# Altium PCB ESP32 with USBC PCB V1l1.PcbDoc (part 3 of 3)
Units mil, origin at the board's own origin, x right, y up, seen from the top; angles counter-clockwise.
Board outline 2700 x 1000 mil, 4 copper layers (L1, L2, L3, L4), stack 61.581 mil thick; 64 components, 73 nets, 299 pads, 161 vias.
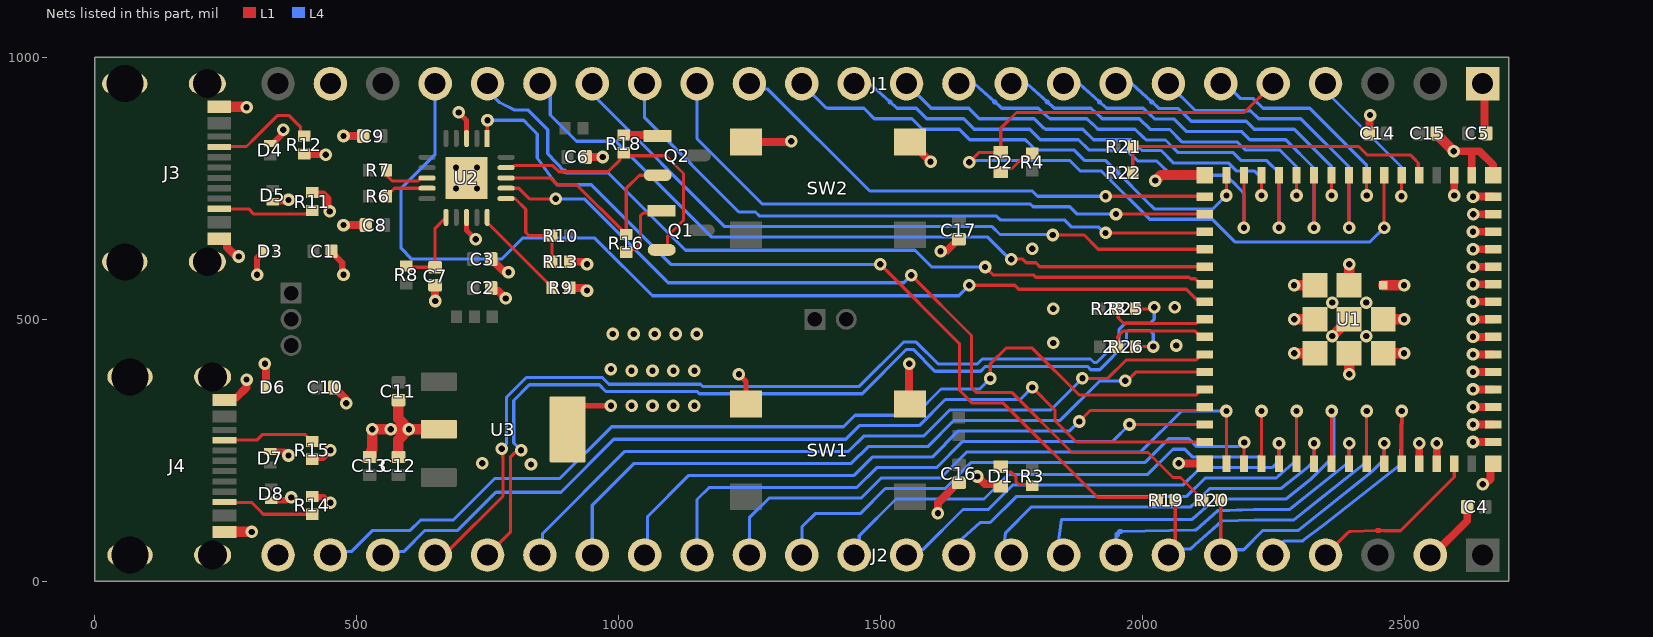
[diagram p4: the nets of this part, all layers, seen from the top]

## Via types
v1: diameter 24, hole 12, L1 to L4, tented both sides, 161 vias

## Nets (pads, with @x,y where several pads share a name; then routed paths per layer and width w, separated by ;. In a path a pad name is that pad's centre, name@x,y a point inside that pad or via, vN(x,y) a via of type N, cw(c..) or ccw(c..) an arc to the next point about the centre after c; other vN are vias at no path point) (continued)
CON_ESP_USB_N: J2.21 R25.1 | length 1793.8
  L1 w6.03: J2.21@650,50 661.09,61.09 678.22,61.09 779.58,162.45 779.58,237.15 779.22,237.51 779.22,250.78 v1(777,253) ; R25.1@1987.01,520 2020,520 v1(2023,523)
  L4 w6.03: v1(777,253) 785.97,261.97 785.97,350.81 824.19,389.03 968.99,389.03 981.87,376.15 1156.24,376.15 1160.4,371.99 1459.6,371.99 1544.22,456.61 1568.39,456.61 1610,415 1685.61,415 1694.93,424.32 1901.25,424.32 1907.87,417.7 1912.86,417.7 1955.97,460.81 1955.97,480.76 1967.72,492.51 2015,492.51 2023,500.51 v1(2023,523)
CON_ESP_USB_P: J2.20 R26.1 | length 1734.7
  L1 w6.03: J2.20@750,50 793.61,93.61 793.61,237.06 803.11,246.56 810.56,246.56 v1(814,250) ; R26.1@1987.01,448 v1(2021,448)
  L4 w6.03: v1(814,250) 800,264 800,345 830,375 963.18,375 976.06,362.12 1150.42,362.12 1154.59,357.95 1465.41,357.95 1550.03,442.58 1562.58,442.58 1604.19,400.97 1691.42,400.97 1700.74,410.29 1895.44,410.29 1902.06,403.67 1918.67,403.67 1970,455 1970,474.95 1973.53,478.49 2015,478.49 2021,472.49 v1(2021,448)
DTR_FTDI: Q2.2 R16.1 U2.18 | length 433.4
  L1 w6: U2.18@785.41,770 870.03,770 883.03,757 920.01,757 1008.19,668.82 1008.19,667.64 1013.82,662.01 R16.1@1015,662.01 1015,750 1040.2,775.2 Q2.2@1075,775.2
ESP_USB_N: R23.2 R25.2 U1.23 | length 190.7
  L1 w6.03: R23.2@1953.01,520 1954.32,518.67 1954.32,502.68 1965,492 2103.57,492 2111.57,500 U1.23@2119.45,500
ESP_USB_P: 2.2 R26.2 U1.24 | length 194.6
  L1 w6.03: R26.2@1952.99,448 1952.99,466.82 1964.14,477.97 2100.14,477.97 2111.57,466.54 U1.24@2119.45,466.54
FTDI_RESET: C7.2 R8.2 U2.11 | length 159.8
  L1 w6: R8.2@595,602.01 597.6,599.41 C7.2@650,599.41 650,673.96 U2.11@670.63,694.59
FTDI_USB_N: R6.2 U2.9 | length 84.6
  L1 w6.03: R6.2@557.01,735 557.01,736.18 564.62,743.8 565.8,743.8 572.32,750.32 U2.9@634.59,750.32
FTDI_USB_P: R7.2 U2.8 | length 94.3
  L1 w6.03: R7.2@557.01,785 557.01,775 567.66,764.34 617.54,764.34 623.19,770 U2.8@634.59,770
GND: C1.1 C2.1 C3.1 C4.1 C5.1 C6.1 C7.1 C8.1 C9.1 C10.1 C11.1 C12.1 C13.1 C14.1 C15.1 C16.1 C17.1 D1.1 D3.1 D4.1 D5.1 D6.1 D7.1 D8.1 J1.1 J1.23 J2.2 J2.24 J3.A1B12 J3.B1A12 J3.S1 J3.S2 J3.S3 J3.S4 J4.A1B12 J4.B1A12 J4.S1 J4.S2 J4.S3 J4.S4 R9.2 R11.1 R12.1 R13.1 R14.1 R15.1 SW1.3 SW1.4 SW2.3 SW2.4 U1.1 U1.2 U1.42 U1.43 U1.46 U1.47 U1.48 U1.49 U1.50 U1.51 U1.52 U1.53 U1.54 U1.55 U1.56 U1.57 U1.58 U1.59 U1.60 U1.61 U1.62 U1.63 U1.64 U1.65 U1.66 U1.67 U1.68 U1.69 U1.70 U1.71 U1.72 U1.73 U2.3 U2.13 U2.21 U3.2 U3.4 | length 3742
  L1 w6: v1@782.32,542.68 v1(785,540)
  L1 w10.01: v1(695,895) 710,880 U2.3@710,845.41 ; U2.13@710,694.59 710,670 v1(727.32,652.68) ; v1@787.32,592.68 788.28,591.72 v1(790,590) ; U3.4@903.03,290 903.03,305.56 932.47,335 v1(985.57,335) ; v1(1230,395) 1243.5,381.5 SW1.4@1243.5,338.58
  L1 w12: v1@310,585.82 310,617.16 317.03,624.19 321.31,624.19 322.2,625.08 D3.1@322.2,630 ; D7.1@335,247.59 362.41,247.59 v1(370,240) ; D4.1@335.11,835.59 339.92,835.59 357.7,853.37 357.7,859.75 v1(360,862.05) ; D8.1@337,154.41 366.16,154.41 371.75,160 v1(375,160) ; D5.1@340,724.41 340.89,725.3 364.05,725.3 366.75,728 v1(370,728) ; R15.1@415,232.99 417.95,235.94 435.94,235.94 v1(450,250) ; R14.1@420.73,163.26 420.73,160.16 420.81,160.08 436.97,160.08 447.05,150 v1(450,150) ; v1@439.02,815.98 v1(441,814) ; C1.1@452.2,630 452.2,628.62 472.7,608.12 472.7,587.3 v1(475,585)
  L1 w15: J3.B1A12@237.64,653.94 248.46,653.94 252.78,649.63 252.78,637.7 268.75,621.72 273.28,621.72 v1(275,620) ; J4.A1B12@247.64,346.06 251.95,350.37 270.37,350.37 290,370 v1(290,385) ; v1(325,415) 327.2,412.8 D6.1@327.2,370 ; R12.1@400,815.98 v1@439.02,815.98 ; R11.1@414.69,743.5 419.23,738.96 436.21,738.96 445,730.17 445,712.27 448.81,708.46 v1(448.81,706.02) ; C10.1@457.2,370 457.2,368.62 461.52,364.31 462.89,364.31 480,347.2 v1(480,340) ; v1(475,680) C8.1@517.8,680 ; v1(475,850) C9.1@512.8,850 ; v1(650,535) C7.1@650,565 ; C2.1@757.2,560 757.2,558.62 761.52,554.31 770.69,554.31 v1@782.32,542.68 ; C3.1@757.2,615 757.2,613.62 761.52,609.31 762.89,609.31 780.48,591.72 v1@788.28,591.72 ; R9.2@907.01,560 935,560 v1(940,555) ; R13.1@907.01,610 935,610 v1(940,605) ; C6.1@937.2,810 v1(970,810) ; SW2.4@1243.5,838.58 1328.58,838.58 v1(1330,840) ; v1(1555,415) 1555,340.08 SW1.3@1556.5,338.58 ; SW2.3@1556.5,838.58 1561.42,838.58 1579.51,820.49 1579.51,817.21 1587.22,809.5 v1(1595.86,800.86) ; v1(1610,130) 1610,149.17 1648.62,187.8 C16.1@1650,187.8 ; v1(1615,630) 1616.72,631.72 1627.55,631.72 1648.62,652.8 C17.1@1650,652.8 ; v1(1685,200) 1699.39,185.61 1725.69,185.61 D1.1@1730,181.3 ; v1(2070,225) 2070.3,224.7 2119.15,224.7 U1.64@2119.45,224.41 ; C14.1@2432.8,855 2433.9,856.1 2433.9,888.9 v1(2435,890) ; U1.42@2528.9,224.41 v1(2528.9,263.5) ; J2.2@2550,50 2555,50 2620.59,115.59 C4.1@2620.59,142.8 ; U1.43@2562.36,224.41 v1(2562.36,263.5) ; v1(2595,820.83) 2630,820.83 ; v1(2595.83,736.5) U1.2@2595.83,775.59 ; U1.1@2629.29,775.59 2629.29,820.12 2630,820.83 ; v1(2631.54,265.75) U1.46@2670.63,265.75 ; v1(2631.54,299.21) U1.47@2670.63,299.21 ; v1(2631.54,332.68) U1.48@2670.63,332.68 ; v1(2631.54,366.14) U1.49@2670.63,366.14 ; v1(2631.54,399.61) U1.50@2670.63,399.61 ; v1(2631.54,433.07) U1.51@2670.63,433.07 ; v1(2631.54,466.54) U1.52@2670.63,466.54 ; v1(2631.54,500) U1.53@2670.63,500 ; v1(2631.54,533.46) U1.54@2670.63,533.46 ; v1(2631.54,566.93) U1.55@2670.63,566.93 ; v1(2631.54,600.39) U1.56@2670.63,600.39 ; v1(2631.54,633.86) U1.57@2670.63,633.86 ; v1(2631.54,667.32) U1.58@2670.63,667.32 ; v1(2631.54,734.25) U1.60@2670.63,734.25 ; v1(2631.89,700.64) U1.59@2670.98,700.64 ; J1.1@2650,950 2653.85,946.15 2653.85,858.35 C5.1@2657.2,855 ; v1@2655,185 2665,195 2665,218.78 U1.65@2670.63,224.41 ; U1.62@2670.63,775.59 2670,776.22 2670,795 2644.17,820.83 2630,820.83
  L1 w20: J3.A1B12@237.64,905.91 284.09,905.91 v1@285,905 ; J4.B1A12@247.64,94.09 v1(300,94.09) ; C13.1@525,237.2 526.38,237.2 528.19,239.02 528.19,248.92 530,250.73 v1(530,290) v1(565,290) v1(600,290) ; C12.1@580,237.2 580,270 v1(600,290) ; C11.1@580,342.8 580,310 v1(600,290) ; U3.2@656.97,290 v1(600,290) ; v1(2025,765) 2026.08,765 2036.67,775.59 U1.63@2119.45,775.59 ; v1(2290,565) 2330.04,565 U1.71@2330.08,564.96 ; v1(2290.04,435.04) U1.73@2330.08,435.04 ; v1(2290.04,500) U1.72@2330.08,500 ; v1(2363,468) U1.61@2395.04,500 ; v1(2395.04,395) U1.70@2395.04,435.04 ; U1.69@2395.04,564.96 v1(2395.04,605) ; U1.68@2460,435.04 v1(2500.04,435.04) ; U1.67@2460,500 v1(2500.04,500) ; U1.66@2460,564.96 v1(2500.04,564.96) ; C15.1@2562.2,855 2562.2,853.62 v1(2595,820.83)
  other v1: 2650,185 833,223 740,225 1025,335 1065,335 1105,335 1145,335 1025,401.99 1065,401.99 1105,401.99 1145,401.99 985.57,405 2065,450 1830,455 2428,468 989,472 1029.43,471.99 1069.43,471.99 1109.43,471.99 1149.43,471.99 1830,520 2062,523 2363,532 2428,532 310,585 1790,635 690,750 730,750 690,790 730,790 290,905
GPIO0: R21.2 R22.2 U1.4 | length 632.2
  L1 w6: R22.2@1982.01,780 R21.2@1982.01,830 2413.31,830 2429.54,813.78 2512.45,813.78 2518.31,807.92 2518.31,807.27 2527.03,798.55 2527.03,777.46 U1.4@2528.9,775.59
GPIO1: J1.4 U1.5 | length 315.8
  L1 w6: v1(2495,735) 2495,775.16 U1.5@2495.43,775.59
  L4 w6: J1.4@2350,950 2350,936 2495,791 v1(2495,735)
GPIO2: D2.1 J1.5 U1.6 | length 1638.2
  L1 w6: v1(1670,800) 1688.7,818.7 D2.1@1730,818.7 1730,865 1760,895 2195,895 J1.5@2250,950 ; v1@2461.97,675.04 U1.6@2461.97,775.59
  L4 w6: v1(1670,800) 1672.68,802.68 1682.54,802.68 1682.86,803 1862.08,803 1882.29,783 1922.19,783 2014.53,691 2134,691 2177,648 2434.93,648 v1(2461.93,675)
GPIO3: J1.6 U1.7 | length 440
  L1 w6: v1(2428.5,736.5) U1.7@2428.5,775.59
  L4 w6: J1.6@2150,950 2159.14,950 2187.8,921.33 2212.2,921.33 2230.53,903 2320,903 2428.5,794.5 v1(2428.5,736.5)
GPIO4: J1.7 U1.8 | length 627.5
  L1 w6: v1(2395,675) v1(2395,675) U1.8@2395.04,775.59
  L4 w6: J1.7@2050,950 2101.64,898.36 2206.89,898.36 2222.25,883 2303,883 2395,791 v1(2395,675)
GPIO5: J1.8 U1.9 | length 569.9
  L1 w6: v1(2361.57,736.5) U1.9@2361.57,775.59
  L4 w6: J1.8@1950,950 1980.14,950 2018.38,915.23 ; 2018.51,915.1 2032.64,902.36 2036.78,902.36 2069.36,902.36 2093.36,878.36 2198.61,878.36 2213.96,863 2290,863 2361.57,791.43 v1(2361.57,736.5)
  L4 w10: 2018.38,915.23 ccw(c2050,950) 2018.51,915.1
GPIO6: J1.9 U1.10 | length 757.4
  L1 w6: v1(2328.07,675) U1.10@2328.11,775.59
  L4 w6: J1.9@1850,950 1879.95,950 1918.46,915.15 ; 1918.6,915.02 1932,903 1936.14,903 2002.1,903 2024.36,882.36 2061.07,882.36 2085.07,858.36 2190.32,858.36 2205.68,843 2274,843 2328.07,788.93 v1(2328.07,675)
  L4 w10: 1918.46,915.15 ccw(c1950,950) 1918.6,915.02
GPIO7: J1.10 U1.11 | length 702.1
  L1 w6: v1(2294.65,736.5) U1.11@2294.65,775.59
  L4 w6: J1.10@1750,950 1779.95,950 1818.46,915.15 ; 1818.6,915.02 1832,903 1836.14,903 1902.08,903 1923.72,883 1994.25,883 2016.07,862.36 2052.79,862.36 2076.79,838.36 2182.04,838.36 2197.4,823 2263,823 2294.65,791.35 v1(2294.65,736.5)
  L4 w10: 1818.46,915.15 ccw(c1850,950) 1818.6,915.02
GPIO8: J1.11 U1.12 | length 884.6
  L1 w6: v1@2261.18,675.04 U1.12@2261.18,775.59
  L4 w6: J1.11@1650,950 1679.95,950 1718.46,915.15 ; 1718.6,915.02 1729.15,905.56 1732,903 1735.83,903 1802,903 1812.56,892.44 1823.72,883 1894.25,883 1909.71,868.71 1909.85,868.58 1915.43,863 1986.29,863 2002.13,848.02 2007.79,842.36 2044.51,842.36 2068.51,818.36 2173.75,818.36 2189.11,803 2238,803 2261.14,779.86 v1(2261.14,675)
  L4 w10: 1718.46,915.15 ccw(c1750,950) 1718.6,915.02
GPIO9: J1.12 U1.13 | length 824.4
  L1 w6: v1(2227.72,736.5) U1.13@2227.72,775.59
  L4 w6: J1.12@1550,950 1597,903 1668.72,903 1688.72,883 1793.72,883 1811.72,865 1813.43,865 1815.43,863 1886.43,863 1907.15,843 1978.33,843 1999.51,822.36 2036.22,822.36 2060.22,798.36 2165.47,798.36 2180.83,783 2214.57,783 2227.72,769.86 v1(2227.72,736.5)
GPIO10: J1.13 U1.14 | length 995.8
  L1 w6: v1@2194.25,675.04 U1.14@2194.25,775.59
  L4 w6: J1.13@1450,950 1479.95,950 1518.46,915.15 ; 1518.6,915.02 1532,903 1568.72,903 1588.72,883 1659,883 1679,863 1785.43,863 1805.43,843 1878.35,843 1898.86,823 1970.19,823 1991.22,802.36 2027.94,802.36 2055.29,775 2160,775 2171.5,763.5 2171.97,763.5 2187.79,747.68 2187.79,747.21 2194.21,740.79 v1(2194.21,675)
  L4 w10: 1518.46,915.15 ccw(c1550,950) 1518.6,915.02
GPIO11: J1.14 U1.15 | length 959
  L1 w6: v1(2160.79,736.5) U1.15@2160.79,775.59
  L4 w6: J1.14@1350,950 1396.51,903.49 1400.52,903 1468.72,903 1471.64,900.07 1488.72,883 1560.43,883 1580.43,863 1650.72,863 1670.72,843 1777,843 1787,833 1787.15,833 1794.22,825.93 1797.15,823 1870.21,823 1884.78,808.8 1884.82,808.76 1890.58,803 1930.37,803 1954.99,778.82 2007.02,726.8 2022.82,711 2135.29,711 v1(2160.79,736.5)
GPIO12: J1.15 U1.16 | length 958.8
  L1 w6: v1(1930,735) 2118.7,735 U1.16@2119.45,734.25
  L4 w6: J1.15@1250,950 1260.33,939.67 1285.33,939.67 1480,745 1790,745 1800,735 v1(1930,735)
GPIO13: J1.16 U1.17 | length 1134.2
  L1 w6: v1(1950,701) 1950.11,700.89 2119.34,700.89 U1.17@2119.45,700.79
  L4 w6: J1.16@1150,950 1150,845 1275,720 1786.72,720 1791.72,715 1861.96,715 1875.96,701 v1(1950,701)
GPIO14: J1.17 U1.18 | length 1226.5
  L1 w6: v1(1930,665) 2117.13,665 U1.18@2119.45,667.32
  L4 w6: J1.17@1050,950 1050,885 1230,705 1261.72,705 1269.72,697 1721.71,697 1728.71,690 1851.18,690 1865.18,676 1917.14,676 1928.14,665 v1(1930,665)
GPIO15: J1.18 U1.19 | length 1312.1
  L1 w6: v1(1829,661) 1889,661 1916.14,633.86 U1.19@2119.45,633.86
  L4 w6: J1.18@950,950 960.33,939.67 960.33,919.67 1203,677 1713.43,677 1728.43,662 1828,662 v1(1829,661)
GPIO16: J1.19 U1.20 | length 1437.7
  L1 w6: v1(1750,615) 1771.82,615 1778.82,608 1797.1,608 1804.71,600.39 U1.20@2119.45,600.39
  L4 w6: J1.19@850,950 869.82,930.18 869.82,890.18 920,840 995,840 1178,657 1705.14,657 1747.14,615 v1(1750,615)
GPIO17: J1.20 U1.21 | length 1559.2
  L1 w6: v1(1700,600) 1715.02,584.98 1791.83,584.98 1796.42,580.39 2089.43,580.39 2092.31,577.52 2100.98,577.52 2108.7,569.8 2116.57,569.8 U1.21@2119.45,566.93
  L4 w6: J1.20@750,950 753.55,934.19 766.6,920.35 772.46,914.49 801.64,900 827.12,900 865,862.12 865,816.44 896.59,783.03 896.69,782.93 899.62,780 980,780 1128,632 1566.18,632 1598.18,600 v1(1700,600)
GPIO18: J1.21 U1.22 | length 1967.8
  L1 w6: v1(1669.98,564.98) 1756.73,564.98 1764.2,557.52 2084.02,557.52 2105.2,536.34 2116.57,536.34 U1.22@2119.45,533.46
  L4 w6: J1.21@650,950 650,870 650,815 605,770 585,750 585,635.5 605.5,615 776.82,615 816.82,655 835,655 955,655 1065,545 1650,545 v1(1669.98,564.98)
GPIO21: J2.19 U1.25 | length 1450.3
  L1 w6: v1(1885.91,387.28) 1934.09,387.28 1969.3,422.48 2102.84,422.48 2108.7,428.34 2108.7,430.2 2111.57,433.07 U1.25@2119.45,433.07
  L4 w6: J2.19@850,50 855.14,55.14 855.14,91.14 1012,248 1439.3,248 1468.3,277 1582.4,277 1632.4,327 1825.63,327 v1(1885.91,387.28)
GPIO26: J2.18 U1.26 | length 1369.9
  L1 w6: v1(1967.55,382.55) 1971.34,382.55 1988.39,399.61 U1.26@2119.45,399.61
  L4 w6: J2.18@950,50 950,145 1030,225 1444.59,225 1476.59,257 1590.68,257 1640.68,307 1843.82,307 1919.37,382.55 v1(1967.55,382.55)
GPIO33: J2.17 U1.28 | length 1226.4
  L1 w6: v1(1880,305) 1901.21,326.21 2105.11,326.21 2111.57,332.68 U1.28@2119.45,332.68
  L4 w6: J2.17@1050,50 1055.33,55.33 1055.33,123.33 1134,202 1449.87,202 1484.87,237 1598.96,237 1648.96,287 1862,287 v1(1880,305)
GPIO34: J2.16 U1.29 | length 1134.8
  L1 w6: v1(1975.79,299.21) U1.29@2119.45,299.21
  L4 w6: J2.16@1150,50 1150,156 1173,179 1455.16,179 1493.16,217 1607.25,217 1657.25,267 1943.57,267 v1(1975.79,299.21)
GPIO35: J2.15 U1.31 | length 1166.9
  L1 w6: U1.31@2160.79,224.41 v1(2160.83,325)
  L4 w6: J2.15@1250,50 1250,121 1288,159 1463.44,159 1501.44,197 1615.53,197 1665.53,247 1997.25,247 2075.25,325 v1(2160.83,325)
GPIO36: J2.14 U1.32 | length 1017.7
  L1 w6: U1.32@2194.25,224.41 v1@2194.25,263.46 ; v1@2194.25,264.25 v1(2195,265)
  L4 w6: J2.14@1350,50 1350.6,100.4 1350.65,104.47 1353.57,107.4 1375.7,129 1461.73,129 1509.73,177 1623.82,177 1673.82,227 2005.53,227 2050.53,272 2089.47,272 2104.47,257 2183.21,257 2191.21,265 v1(2195,265)
GPIO37: J2.13 U1.33 | length 1068.6
  L1 w6: U1.33@2227.72,224.41 v1@2227.72,324.96
  L4 w6: J2.13@1450,50 1459.73,59.73 1459.73,86.73 1530,157 1698,157 1745,204 2010.82,204 2058.82,252 2081.18,252 2096.18,237 2221.9,237 2227.76,242.86 v1(2227.76,325)
GPIO38: J2.12 U1.34 | length 858.2
  L1 w6: U1.34@2261.18,224.41 v1(2261.18,263.5)
  L4 w6: J2.12@1550,50 1560.33,60.33 1581.19,60.33 1657.86,137 1706.28,137 1753.28,184 2074.17,184 2078.27,184 2111.38,217 2244.32,217 2248.07,217 2261.18,230.11 v1(2261.18,263.5)
GPIO39: J2.11 U1.35 | length 926.4
  L1 w6: U1.35@2294.65,224.41 v1@2294.65,324.96
  L4 w6: J2.11@1650,50 1650,74.64 1653.78,78.78 1657,82 1690.16,112 1709.57,112 1759.16,161.59 2079.85,161.59 2083.91,161.59 2086.82,164.42 2117.43,194.17 2120.34,197 2256.36,197 2262.92,203.56 2266.19,206.27 2294.69,231.16 v1(2294.69,325)
GPIO40: J2.10 U1.36 | length 763
  L1 w6: U1.36@2328.11,224.41 v1(2328.11,263.5)
  L4 w6: J2.10@1750,50 1736.68,66.8 1736.68,70.86 1739.17,92.51 1788.26,141.59 2091.89,141.59 2094.58,143.97 2095.01,144.39 2102.05,151.17 2102.19,151.3 2106.75,155.87 2109.24,158.1 2125.96,174.2 2128.87,177 2150.96,177 2261.78,177 2265.24,177 2318.24,219.66 2319.04,220.38 2328.11,229.45 v1(2328.11,263.5)
GPIO41: J2.9 U1.37 | length 826.6
  L1 w6: U1.37@2361.57,224.41 v1(2361.61,325)
  L4 w6: J2.9@1850,50 1838.89,64.85 1838.89,68.9 1845.97,117.94 2095.36,117.94 2139.42,157 2274.54,157 2321.86,194.92 2365.62,238.68 2365.62,320.99 v1(2361.61,325)
GPIO42: J2.8 U1.38 | length 605.8
  L1 w6: U1.38@2395.04,224.41 v1(2395.04,263.5)
  L4 w6: J2.8@1950,50 1950,86.52 1952.34,88.86 ; 1952.69,90.38 1957.07,94.77 ; 1959.28,95.16 2099.45,98.02 2099.67,98.03 2103.32,98.27 2144.17,134.48 2213.96,137 2281.56,137 2391.72,225.27 2395.04,228.58 v1(2395.04,263.5)
  L4 w10: 1952.34,88.86 cw(c1959.39,88.06) 1952.69,90.38 ; 1957.07,94.77 cw(c1959.39,88.06) 1959.28,95.16
GPIO45: J2.5 U1.41 | length 511.7
  L1 w6: U1.41@2495.43,224.41 v1@2495.43,324.96
  L4 w6: J2.5@2250,50 2256.56,68.61 2259.38,71.42 2271.03,77 2306.42,77 2347.16,107.86 2347.24,107.92 2490.42,220.76 2493.69,224.03 2493.76,228.07 v1(2495.47,325)
GPIO46: J2.4 U1.44 | length 332.4
  L1 w6: J2.4@2350,50 2392.22,92.22 2395,95 2398.92,95.14 2448.16,96.96 ; 2452.93,96.91 2461.58,96.37 2466.37,96.37 2466.46,96.46 2493.17,96.46 2595.83,199.11 U1.44@2595.83,224.41
  L1 w10: 2448.16,96.96 cw(c2450,50) 2452.94,96.91
GPIO47: J2.23 U1.27 | length 1892
  L1 w6: v1(1710,387) 1710,415 1740,445 1790,445 1879.45,355.55 2102.84,355.55 2108.7,361.41 2108.7,363.27 2111.57,366.14 U1.27@2119.45,366.14
  L4 w6: J2.23@450,50 456.47,56.47 490,56.47 530.53,97 602.25,97 622.25,117 684.64,117 763.64,196 888,196 987,295 1429.74,295 1451.74,317 1565.83,317 1615.83,367 1690,367 v1(1710,387)
GPIO48: J2.22 U1.30 | length 1756.9
  L1 w6: v1(1790,370) 1833.47,326.53 1833.47,306.53 1874.25,265.75 U1.30@2119.45,265.75
  L4 w6: J2.22@550,50 556.47,56.47 590,56.47 630.53,97 692.92,97 765.92,170 890.28,170 991.28,271 1434.02,271 1460.02,297 1574.11,297 1624.11,347 1767,347 v1(1790,370)
NetD1_2: D1.2 R3.1 | length 80
  L1 w6: D1.2@1730,218.7 1731.97,218.7 1742.56,208.11 1749.99,208.11 1758.78,199.32 1758.78,190.5 1764.64,184.64 1788.35,184.64 R3.1@1790,182.99
NetD2_2: D2.2 R4.1 | length 74.8
  L1 w6: D2.2@1730,781.3 1736.81,788.11 1751.46,788.11 1774.73,811.38 1784.37,811.38 R4.1@1790,817.01
NetJ3_A5: J3.A5 R12.2 | length 210.2
  L1 w6: J3.A5@237.64,829.13 238.54,830.04 289.81,830.04 308.19,848.42 308.19,848.69 316.98,857.48 317.25,857.48 348.82,889.05 371.18,889.05 393.19,867.04 393.19,855.63 398.82,850 R12.2@400,850
NetJ3_B5: J3.B5 R11.2 | length 184.4
  L1 w6: J3.B5@237.64,711.02 293.98,711.02 304,701 305,701 402.33,701 403.69,702.36 409.37,702.36 R11.2@415,707.99
NetJ4_A5: J4.A5 R15.2 | length 177.9
  L1 w6: J4.A5@247.64,269.29 309.29,269.29 320,280 402.01,280 408.19,273.82 408.19,272.64 413.82,267.01 R15.2@415,267.01
NetJ4_B5: J4.B5 R14.2 | length 177
  L1 w6: J4.B5@247.64,151.18 248.54,150.28 270.02,150.28 270.08,150.21 299.79,150.21 315,135 322.01,127.99 R14.2@415,127.99
NetQ1_1: Q1.1 R16.2 | length 131
  L1 w6: R16.2@1015,627.99 1020.63,633.62 1030.27,633.62 1041.81,645.16 1041.81,697.26 1047.67,703.12 1078.29,703.12 Q1.1@1082.58,707.4
NetQ2_1: Q2.1 R18.2 | length 63
  L1 w15: R18.2@1010,852.01 Q2.1@1072.99,852.01
NetR9_1: R9.1 U2.15 | length 175.1
  L1 w6: U2.15@749.6,683.06 750.35,682.3 751.86,682.3 867.35,566.81 872.99,561.18 R9.1@872.99,560
RTS_FTDI: Q1.2 R18.1 U2.19 | length 547.3
  L1 w6: U2.19@785.41,789.68 796.72,789.68 800.63,793.6 874.71,793.6 886.5,781.81 979.99,781.81 1003.19,805.01 1003.19,812.36 1008.82,817.99 R18.1@1010,817.99 1015.63,812.36 1090.43,812.36 1124.29,778.5 1124.29,689.46 1093.69,658.86 1093.69,638.38 1087.91,632.6 Q1.2@1082.58,632.6
RXD_FTDI: R19.2 U2.1 | length 1697.8
  L1 w6: U2.1@749.37,845.41 749.6,845.64 749.6,870 749.6,879.6 v1(750,880) ; v1(1500,605) 1651,454 1651,365 1654,362 1654,361.72 1675.72,340 1735,340 1915.17,159.83 2024.16,159.83 R19.2@2028.99,155
  L4 w6: v1(750,880) 818.84,880 828.84,870 835,863.84 842.07,856.77 845,853.84 845,808.16 877.14,762.86 883,757 887.14,757 891.18,757 948,757 1100,605 v1(1500,605)
TXD_FTDI: R20.2 U2.17 | length 1646.9
  L1 w6: U2.17@785.41,750.32 809.69,750.32 823.02,736.98 830,730 v1(880,730) ; v1(1559.09,584.09) 1674,469.18 1674,370 1684,360 1751.72,360 1865.97,245.75 2011.07,245.75 2058.82,198 2072.99,198 R20.2@2115.99,155
  L4 w6: v1(880,730) 935,730 1095,570 1545,570 v1(1559.09,584.09)
U0RXD: J2.6 R20.1 U1.40 | length 555.4
  L1 w6: J2.6@2150,50 R20.1@2150.01,155 ; U1.40@2461.97,224.41 v1(2461.97,263.5)
  L4 w6: J2.6@2150,50 2160,60 2193.53,60 2230.53,97 2260.49,97 2298.13,97 2433.51,205.47 2442.27,213 2461.97,232.69 v1(2461.97,263.5)
U0TXD: J2.7 R19.1 U1.39 | length 752.8
  L1 w6: J2.7@2050,50 2050,64.61 2063.01,77.62 R19.1@2063.01,155 ; U1.39@2428.5,224.41 v1(2428.54,325)
  L4 w6: J2.7@2050,50 2050.43,55.7 2055.88,61.15 2092.6,62.04 2101.02,69.5 2152.07,114.75 2214.32,117 2289.85,117 2330.44,149.53 2425.23,225.47 2428.54,228.79 v1(2428.54,325)
VBUS_SENSE: R10. R13.2 U2.16 | length 193.9
  L1 w6: U2.16@785.41,730.63 802.36,730.63 823.02,709.97 823.02,665.86 828.88,660 R10.@872.99,660 ; R13.2@872.99,610 R10.@872.99,661.18
pads on no net: J1.24 J3.A8 J3.B8 J4.A8 J4.B8 U2.2 U2.4 U2.5 U2.6 U2.7 U2.14

## Polygon pours and split planes (outlines as drawn)
GND on L1 "GND_L01_P021" (solid, pour order 21): 1168,510 873.8,510 691.27,320 600,320 600,350.33 594,358 505,358 505,225 700,225 755,280 840,280 840,250 869,221 1168,221
GND on L1 "GND_L01_P020" (solid, pour order 20): 2268,623 2520,623 2520,382 2268,382
+5V_VBUS2 on L1 "+5V_VBUS2_L01_P019" (solid, pour order 19): 346,474 435,461 435,340 346,340
+5V_VBUS1 on L1 "+5V_VBUS1_L01_P018" (solid, pour order 18): 340,530 430,530 430,655 340,655
+5V on L1 "+5V_L01_P017" (solid, pour order 17): 700,355 700,410 575,410 465,520 355,520 355,490 375,475 455,470 560,365 610,365 620,355
+3V3_REG on L1 "+3V3_REG_L01_P016" (solid, pour order 16): 701,220 701,133 700,134 499,134 499,219 500,220
+3V3_FTDI on L1 "+3V3_FTDI_L01_P014" (solid, pour order 14): 615,555 570,555 535,590 543,693 535,590 535,698.18 535,700 550,700 565,700 605,740 605,665 635,665 635,640 620,625 580,625 580,582 615,582
+3V3_FTDI on L1 "+3V3_FTDI_L01_P013" (solid, pour order 13): 915,880 915,795 890,795 885,800 885,810 815,810 795,830 795,880
+3V3 on L1 "+3V3_L01_P002" (solid, pour order 12): 2451,836 2549,836 2549,904 2451,904 2451,884
+3V3_REG on L2 "+3V3_REG_L02_P023" (solid, pour order 23): 680,134 680,221 502,221 502,134
+3V3 on L2 "+3V3_L02_P022" (solid, pour order 22): 2680,20 2680,980 900,980 1020,860 1067,860 1227,700 1412,700 1412,473 1431,473 1461.03,473 1461.03,700 1780,700 1820,740 1913,740 1966,793 2467,793 2580,680 2521,621 2521,180 2400,180 2300,80 2300,20
GND on L2 "GND_L02_P024" (solid, pour order 24): 20.14,20.31 2679.69,20.31 2680,20 2680,980 20,980 20,20
GND on L3 (split plane): 2699.95,0.05 0.05,0.05 0.05,999.95 2699.95,999.95

## Silkscreen, mask and mechanical layers (free items; w line width, h text height)
Top Overlay:
  lines w6: 750,95 750,115 ; 750,890 750,905 ; 1250,95 1250,115 ; 1250,885 1250,905 ; 1750,95 1750,115 ; 1750,885 1750,905 ; 2050,885 2050,905 ; 2250,95 2250,110
  text "J1" at 2326,836 h40
  text "USER" at 1711,701 h40
  text "BOOT/USR" at 1246.72,571 h40
  text "USB1" at 431,531 h40
  text "UART" at 21,526 h40
  text "3V3" at 1491,486 h40
  text "REG" at 1201,481 h40
  text "+5V" at 436,476 h40
  text "ESP" at 16,431 h40
  text "USB2" at 431,421 h40
  text "RESET" at 1306.7,386 h40
  text "POWER" at 1706,266 h40
  text "J2" at 2321,116 h40
Bottom Overlay:
  text "NC" at 368.04,881.71 h40 r90
  text "GND" at 468.04,881.71 h40 r90
  text "IO18" at 673.04,881.71 h40 r90
  text "IO17" at 773.04,881.71 h40 r90
  text "IO15" at 968.04,881.71 h40 r90
  text "IO14" at 1068.04,881.71 h40 r90
  text "IO13" at 1173.04,881.71 h40 r90
  text "IO12" at 1273.04,881.71 h40 r90
  text "IO11" at 1373.04,881.71 h40 r90
  text "IO7" at 1773.04,881.71 h40 r90
  text "IO6" at 1873.04,881.71 h40 r90
  text "IO5" at 1973.04,881.71 h40 r90
  text "IO1" at 2373.04,881.71 h40 r90
  text "3V3" at 2573.04,881.71 h40 r90
  text "5V" at 564,879 h40 r90
  text "IO16" at 869,879 h40 r90
  text "IO10" at 1474,879 h40 r90
  text "IO9" at 1574,879 h40 r90
  text "IO8" at 1669,879 h40 r90
  text "IO4" at 2074,879 h40 r90
  text "IO3" at 2169,879 h40 r90
  text "IO2" at 2274,879 h40 r90
  text "IO0" at 2469,879 h40 r90
  text "GND" at 2669,879 h40 r90
  text "<---PIN1--->" at 2669,749 h40 r90
  text "(C)2025 Hyukjin Jeong" at 1889,349.33 h40
  text "GND" at 374,265 h40 r90
  text "IO47" at 474,265 h40 r90
  text "IO48" at 574,265 h40 r90
  text "USB-" at 674,265 h40 r90
  text "USB+" at 774,265 h40 r90
  text "IO21" at 874,265 h40 r90
  text "IO26" at 974,265 h40 r90
  text "IO33" at 1074,265 h40 r90
  text "IO34" at 1174,265 h40 r90
  text "IO35" at 1274,265 h40 r90
  text "IO36" at 1374,265 h40 r90
  text "IO37" at 1474,265 h40 r90
  text "IO38" at 1574,265 h40 r90
  text "IO39" at 1674,265 h40 r90
  text "IO40" at 1774,265 h40 r90
  text "IO41" at 1874,265 h40 r90
  text "IO42" at 1974,265 h40 r90
  text "TXD" at 2074,265 h40 r90
  text "RXD" at 2174,265 h40 r90
  text "IO45" at 2274,265 h40 r90
  text "IO46" at 2374,265 h40 r90
  text "EN" at 2474,265 h40 r90
  text "GND" at 2574,265 h40 r90
  text "3V3" at 2674,265 h40 r90
Board Shape:
  the board outline again, w20

## Text inside footprints (layer, text, board x,y; h text height)
J1: Bottom Overlay "1" at 2623,1019 h40 r270
J2: Bottom Overlay "1" at 2626,-34 h40 r270
J5: Top Overlay "1" at 302,533 h40